# Altium PCB CEF JFET.PcbDoc
Units mil, origin at the board's own origin, x right, y up, seen from the top; angles counter-clockwise.
Board outline 6000 x 4000 mil, 2 copper layers (Top Layer, Bottom Layer); 7 components, 5 nets, 15 pads, 0 vias.
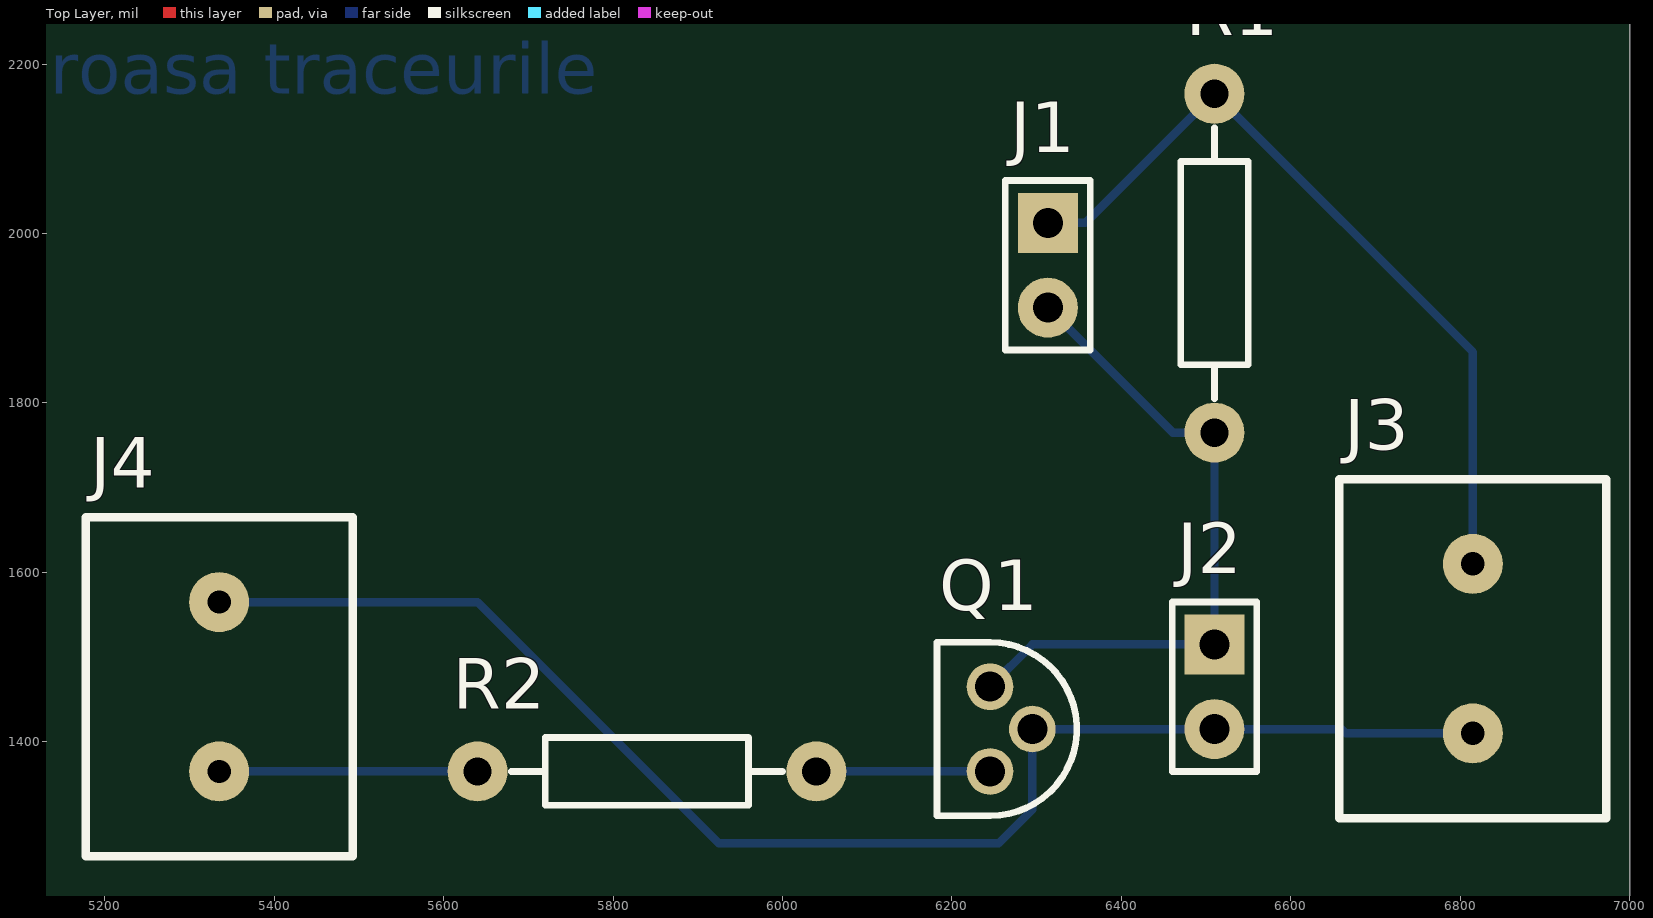
[diagram p0: Top Layer view]
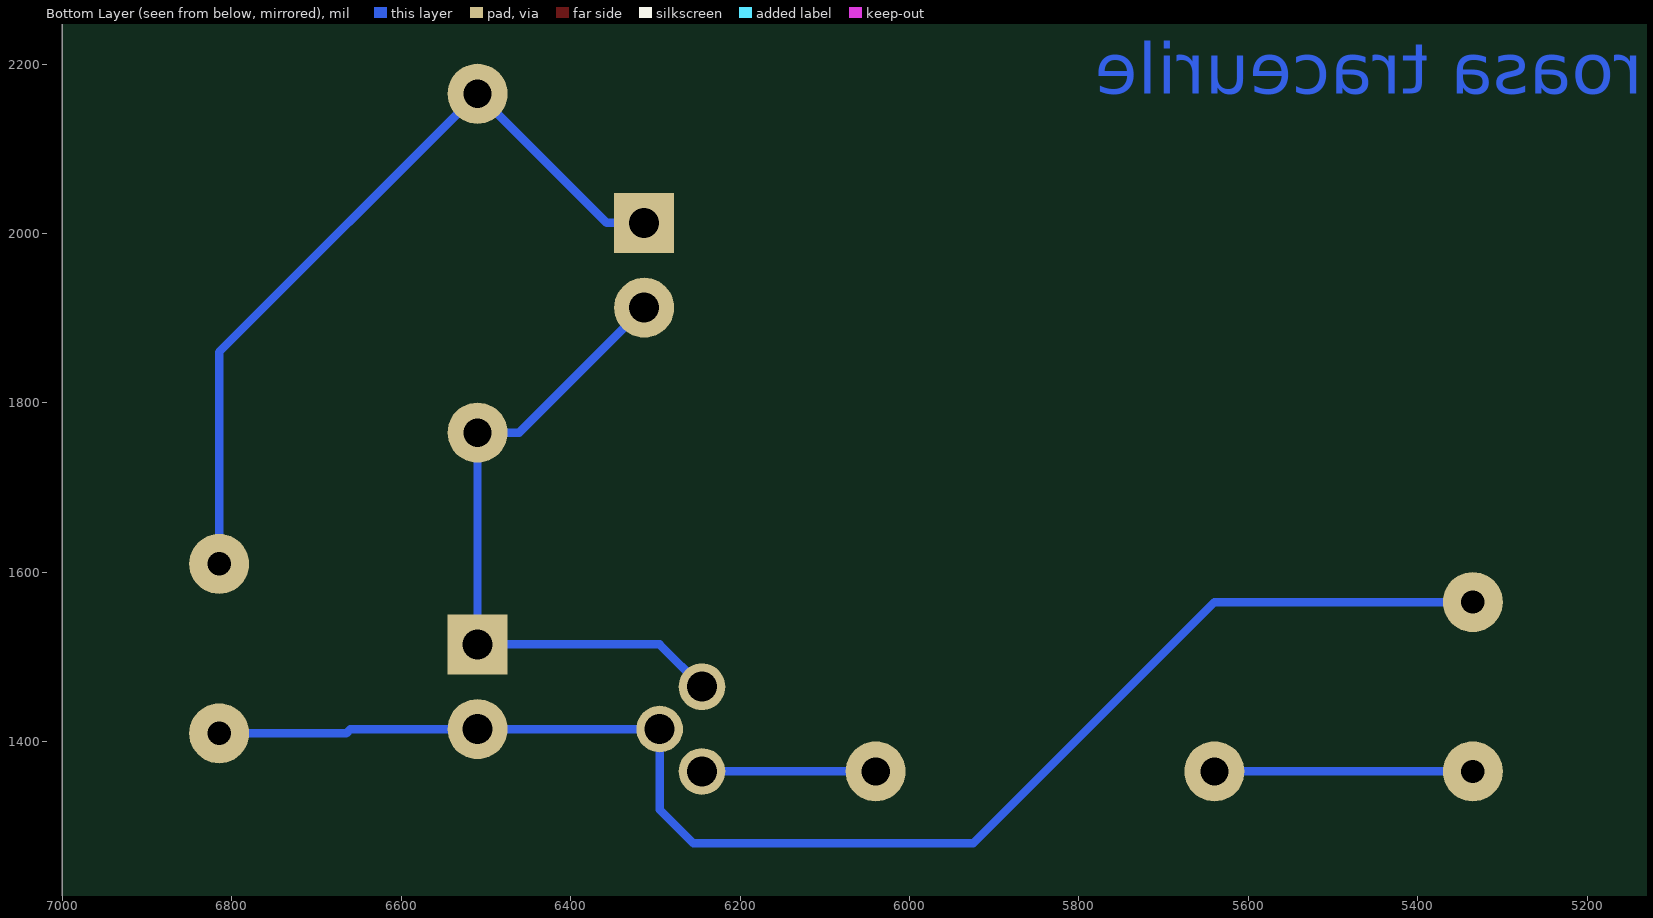
[diagram p1: Bottom Layer view, seen from below]

## Layer stack, top to bottom
Top Solder: solder mask 0.4, Solder Resist, Dk 3.5
Top Layer: signal copper 1.4
Dielectric 1: dielectric 12.6, FR-4, Dk 4.8
Bottom Layer: signal copper 1.4
Bottom Solder: solder mask 0.4, Solder Resist, Dk 3.5

## Board outline
1000,1000 7000,1000 7000,5000 1000,5000

## Design rules (kind name [scope] priority, off if disabled: settings)
Clearance [All] p1: gap=10 ignorepadtopadclearanceinfootprint=FALSE
PolygonConnect [All] p1: connectstyle=Relief reliefconductorwidth=10 reliefentries=4 polygonreliefangle="90 Angle" airgapwidth=10
RoutingVias [All] p1: holewidth=28 width=50 viastyle="Through Hole" minholewidth=28 minwidth=50 maxholewidth=28 maxwidth=50
SolderMaskExpansion [All] p1: expansion=4 istentingtop=FALSE
SupplyNets "Schematic Supply Nets_2" [InNet('VCC')] p1: voltage=0.000
SupplyNets "Schematic Supply Nets_1" [InNet('VDD')] p2: voltage=0.000
SupplyNets "Schematic Supply Nets" [InNet('GND')] p3: voltage=0.000
Width [All] p1: maxlimit=10 minlimit=10 preferedwidth=10
30 further rules are at their usual default settings.

## Components (designator, comment, footprint, x,y, rotation, side; value= is the part's Value field where it differs from the comment)
J1 "VR2" HDR_1x2_pin 6313.19,2012.51 r90 top
J2 "VDS" HDR_1x2_pin 6510,1515 r90 top
J3 "VDD" HDR_1X2_TE 6815,1610 r0 top
J4 "VGG" HDR_1X2_TE 5335,1365 r180 top
Q1 "2N5458" FP-29-11-MFG 6265,1415 r180 top
R1 "500R" Resistor 6510,1765 r90 top
R2 "33k" Resistor 5640,1365 r0 top

## Footprints (in the part's own frame and the unit in brackets; to place one, negate y for a bottom-side part, rotate by r counter-clockwise, add the part's x,y. Pads: shape width x height; smd on the part's side, far side on the other; paste and mask are expansions set on the pad)
FP-29-11-MFG [mm]
  round 1.4 hole 0.9 paste-2539.97 mask+0: 1(0.507,-1.27) 2(-0.763,0) 3(0.507,1.27)
  silkscreen extent -2.09,-2.6 2.09,2.6, body extent -2.19,-2.7 2.19,2.7, height 0.25
HDR_1x2_pin [mm]
  rect 1.8x1.8 hole 0.9: 1(0,0)
  round 1.8 hole 0.9: 2(-2.54,0)
  silkscreen extent -3.81,-1.27 1.27,1.27
HDR_1X2_TE [mm] "282836-2"
  round 1.8 hole 0.7: 1(0,0) 2(0,-5.08)
  silkscreen extent -4,-7.62 4,2.54
Resistor [mm] "Res_2mm_AxialTH"
  round 1.8 hole 0.85: 1(0,0) 2(10.16,0)
  silkscreen extent 1.02,-1.02 9.14,1.02

## Part data
J1 J2: library part HDR_1x2, "Header, 2-Pin"
J3 J4: library part CON_1x2, "Connector, 2-Ports"
Q1: library part CMP-00278-00153544-1, "2N5458 Small Signal Field-Effect Transistor, 25V, 1-Element, N-Channel, Silicon, Junction FET, TO-92", Breakdown Voltage=25V, Case/Package=TO-92, Continuous Drain Current (ID)=9mA, Current Rating=10mA, Gate to Source Voltage (Vgs)=-25V, Input Capacitance=7pF, Manufacturer Lifecycle Status=OBSOLETE, Max Junction Temperature (Tj)=135°C, Max Power Dissipation=625mW, Min Operating Temperature=-55°C, Drain to Source Breakdown Voltage=25V, Drain to Source Voltage (Vdss)=25V, Element Configuration=Single, Height=7.87mm, Lead Free="Lead Free", Lifecycle Status=Obsolete, Max Operating Temperature=135°C, Mount="Through Hole", NexarPartId=153544, Number of Channels=1, Number of Pins=3, Packaging=Bulk, Power Dissipation=625mW, REACH SVHC="No SVHC", RoHS=Compliant, Voltage Rating (DC)=25V, Weight=201mg
R1 R2: library part "Resistor 0.25W 5mm", "0.25W,Axial"

## Nets (pads, with @x,y where several pads share a name; then routed paths per layer and width w, separated by ;. In a path a pad name is that pad's centre, name@x,y a point inside that pad or via, vN(x,y) a via of type N, cw(c..) or ccw(c..) an arc to the next point about the centre after c; other vN are vias at no path point)
GND: J2.2 J3.2 J4.2 Q1.2 | length 1711.7
  Bottom Layer w10: J4.2 5640,1565 5925,1280 6255.02,1280 6295.02,1320 Q1.2 J2.2 6660,1415 6665,1410 J3.2
NetJ1_2: J1.2 J2.1 Q1.1 R1.1 | length 793.6
  Bottom Layer w10: Q1.1 6295.02,1515 J2.1 R1.1 6460.7,1765 J1.2
NetJ4_1: J4.1 R2.1 | length 305
  Bottom Layer w10: J4.1 R2.1
NetQ1_3: Q1.3 R2.2 | length 205
  Bottom Layer w10: R2.2 Q1.3
VDD: J1.1 J3.1 R1.2 | length 941.3
  Bottom Layer w10: J1.1 6357.51,2012.51 R1.2 6815,1860 J3.1

## Other copper
Bottom Layer:
  text "todo:ingroasa traceurile" at 4795,2164.99 h60